# Altium PCB PWM_controller.PcbDoc
Units mm, origin at the board's own origin, x right, y up, seen from the top; angles counter-clockwise.
Board outline 60 x 55 mm, 2 copper layers (Top Layer, Bottom Layer); 77 components, 41 nets, 184 pads, 151 vias.
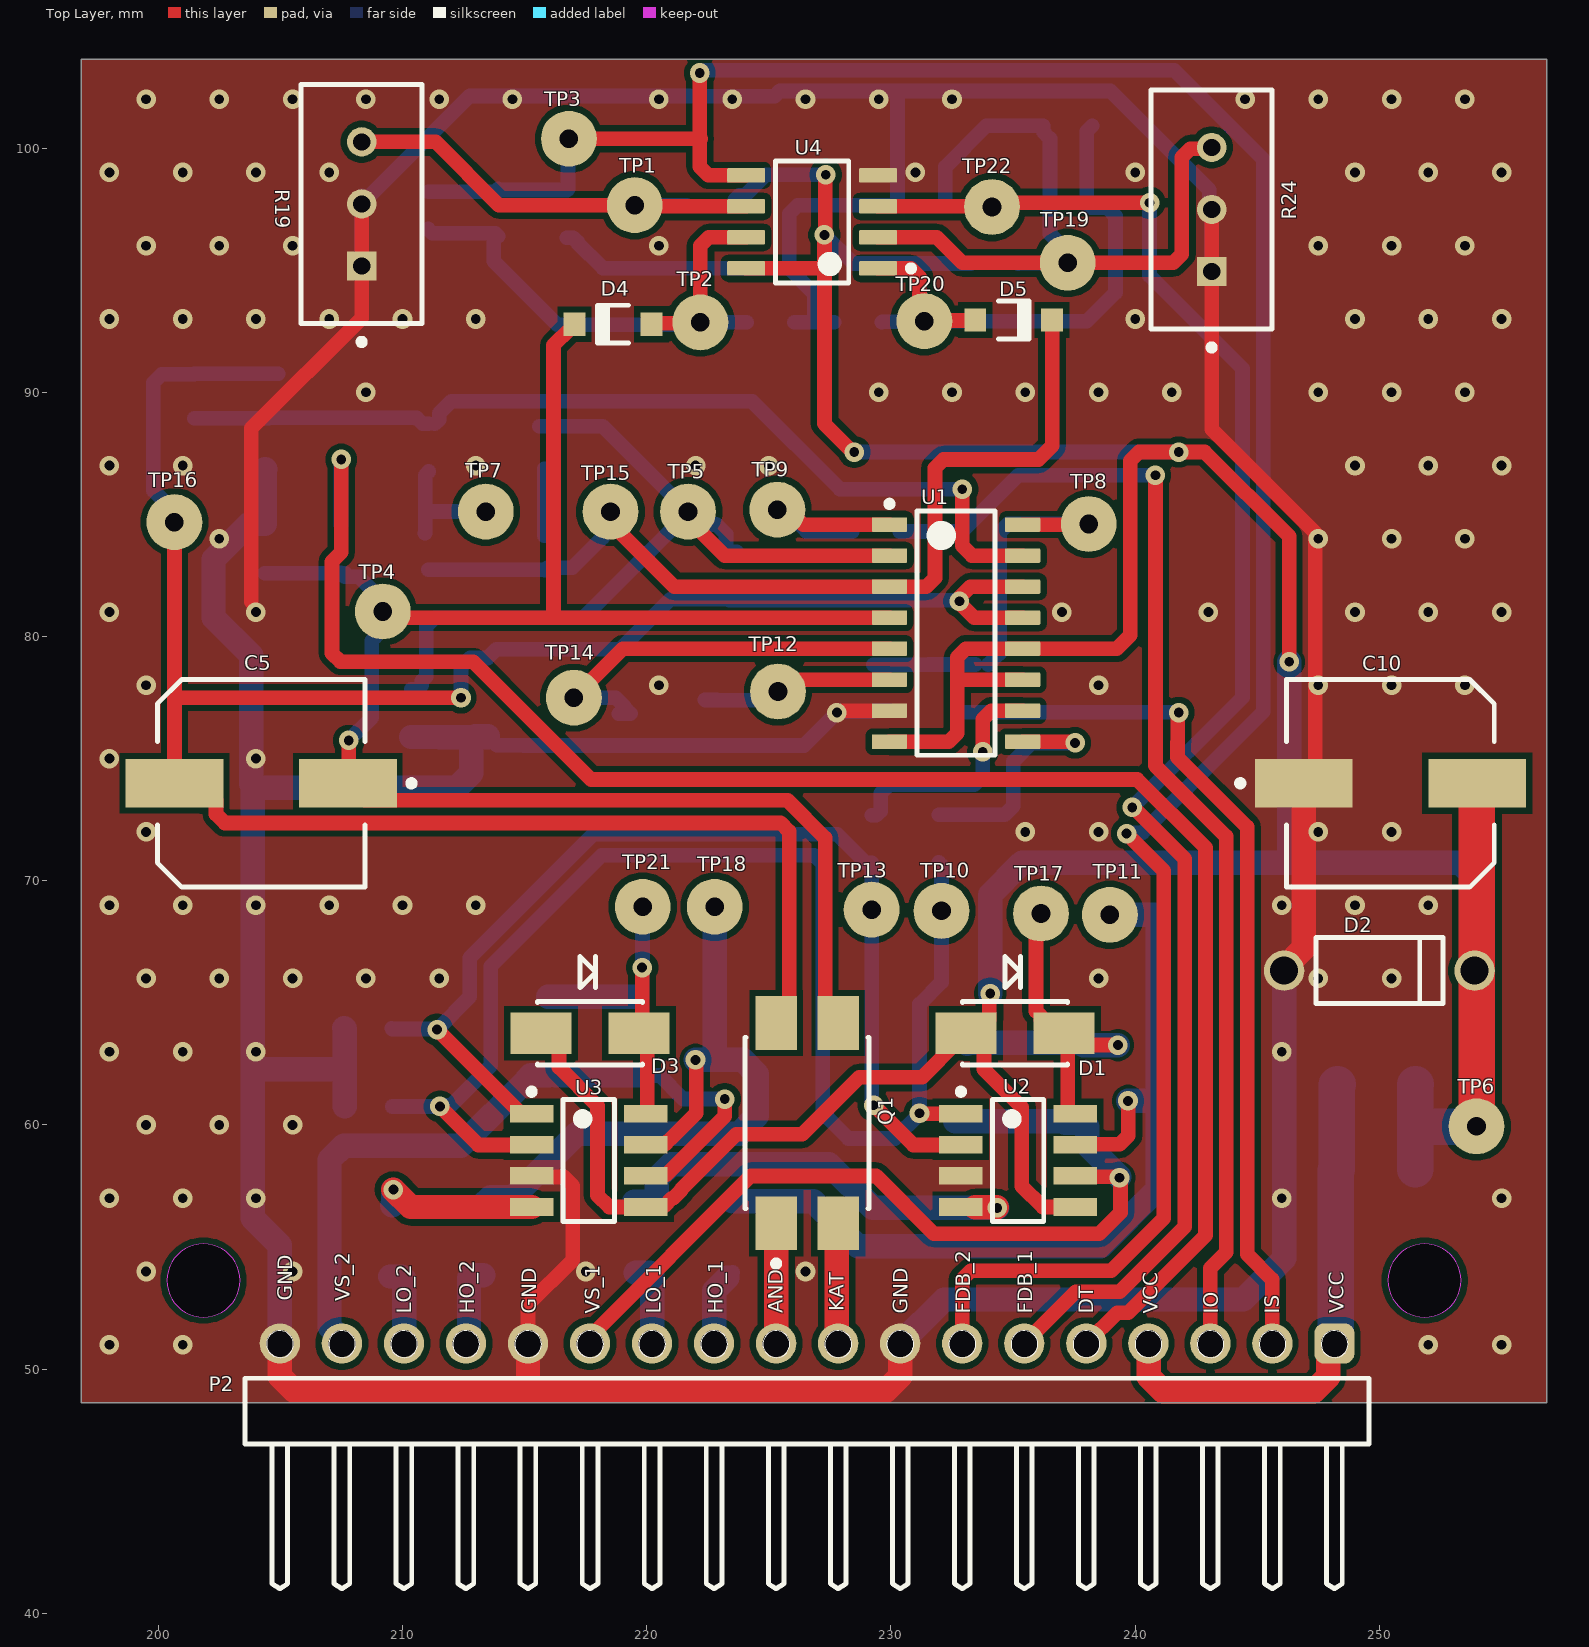
[diagram p0: Top Layer view]
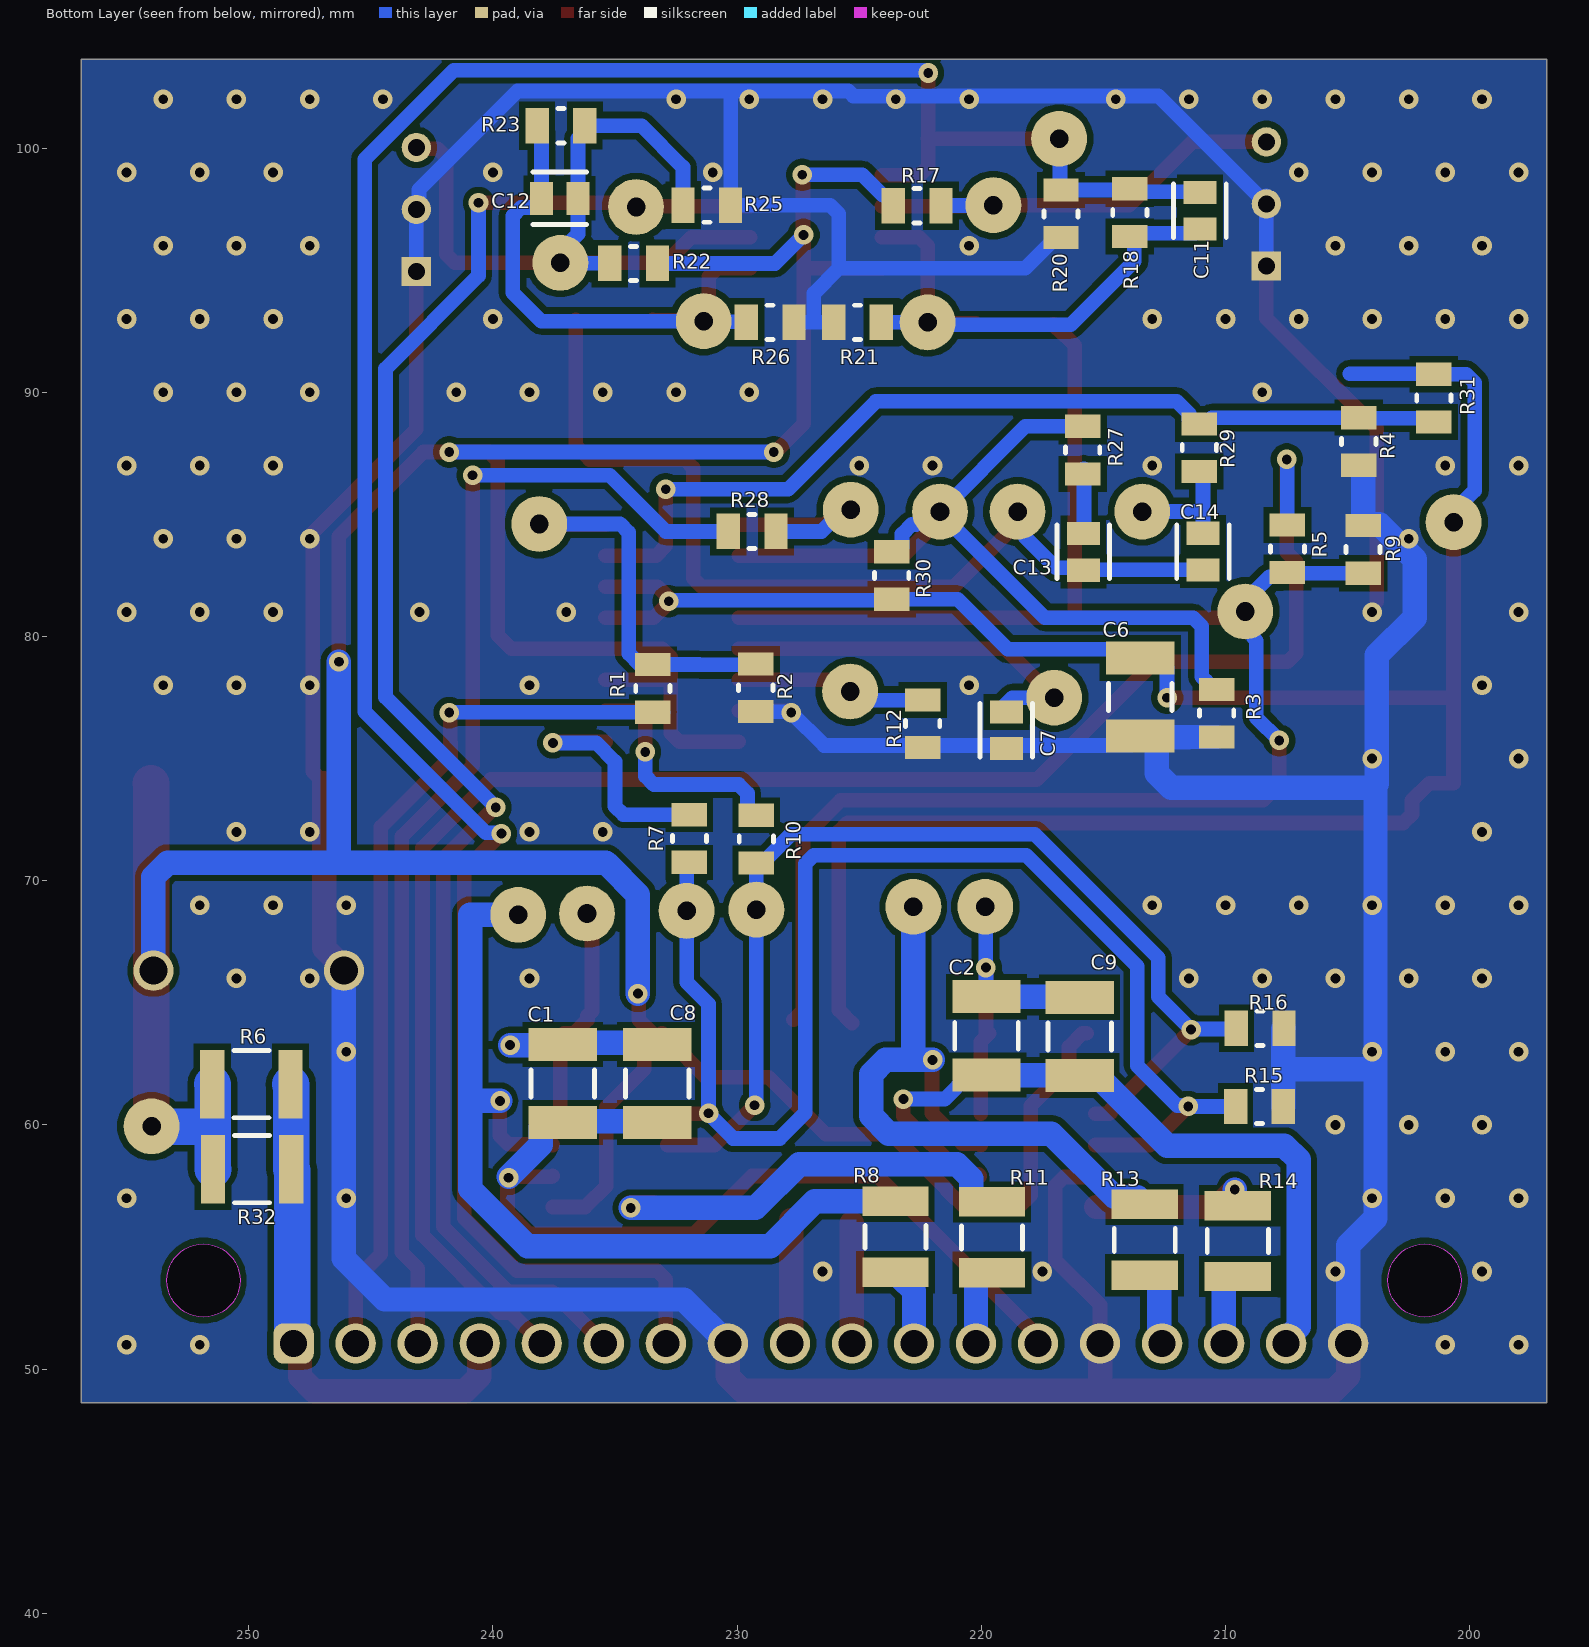
[diagram p1: Bottom Layer view, seen from below]
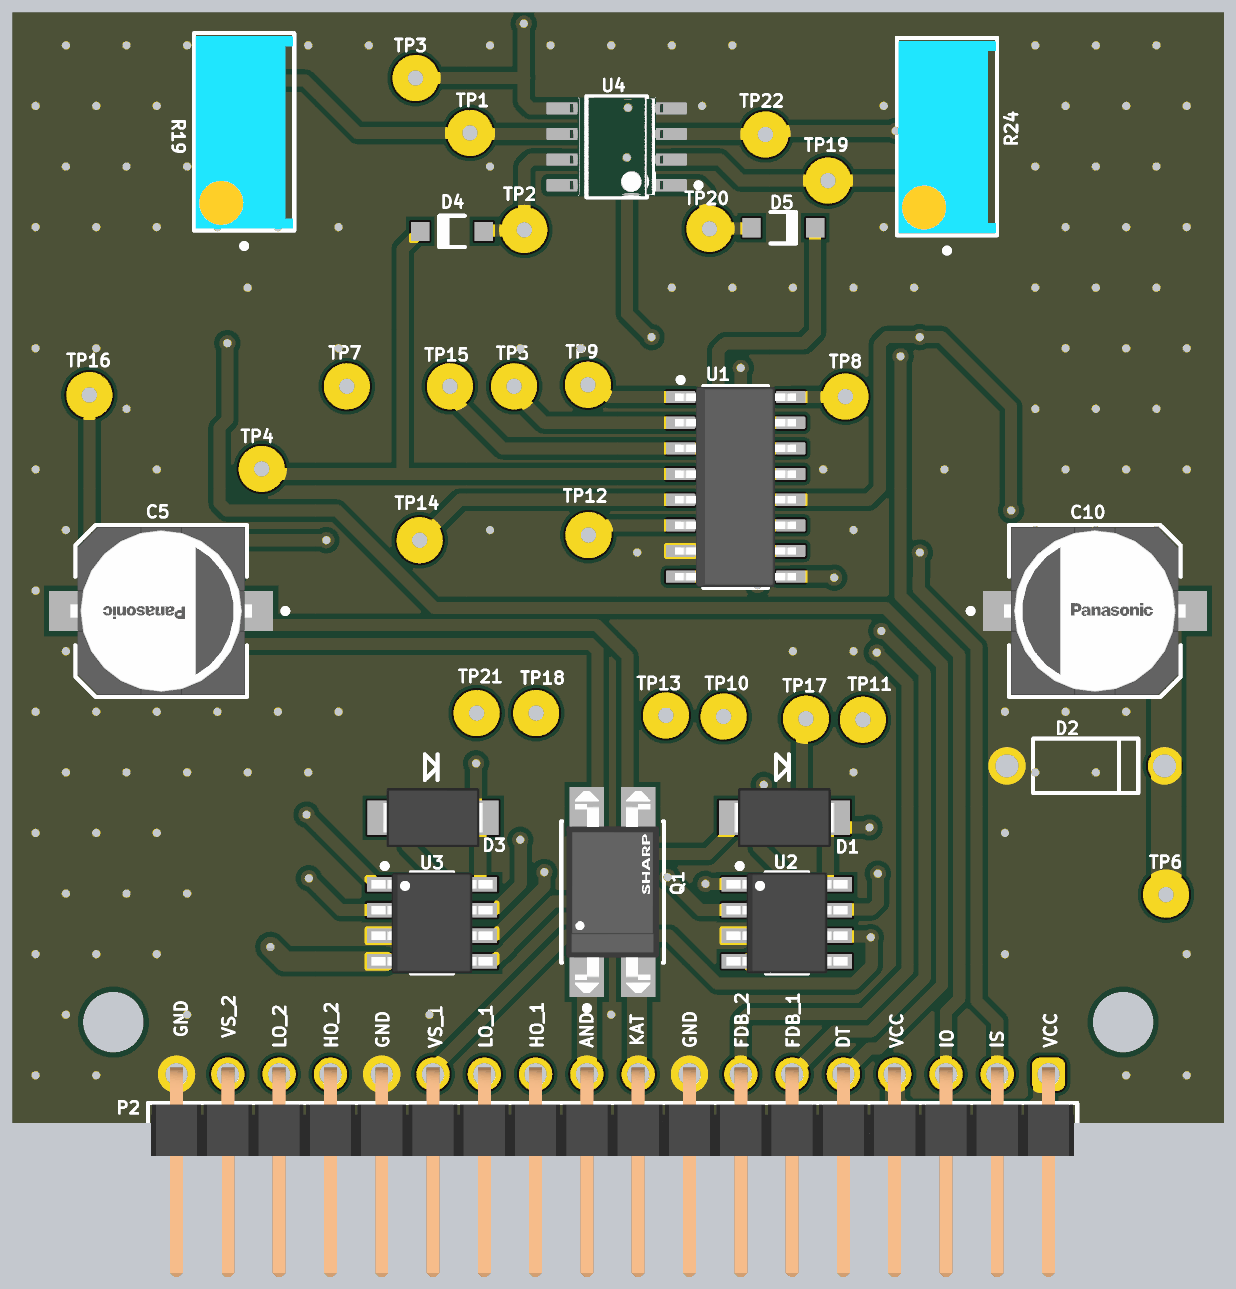
[diagram p2: 3D render of the assembled board from above, using the file's embedded part models]
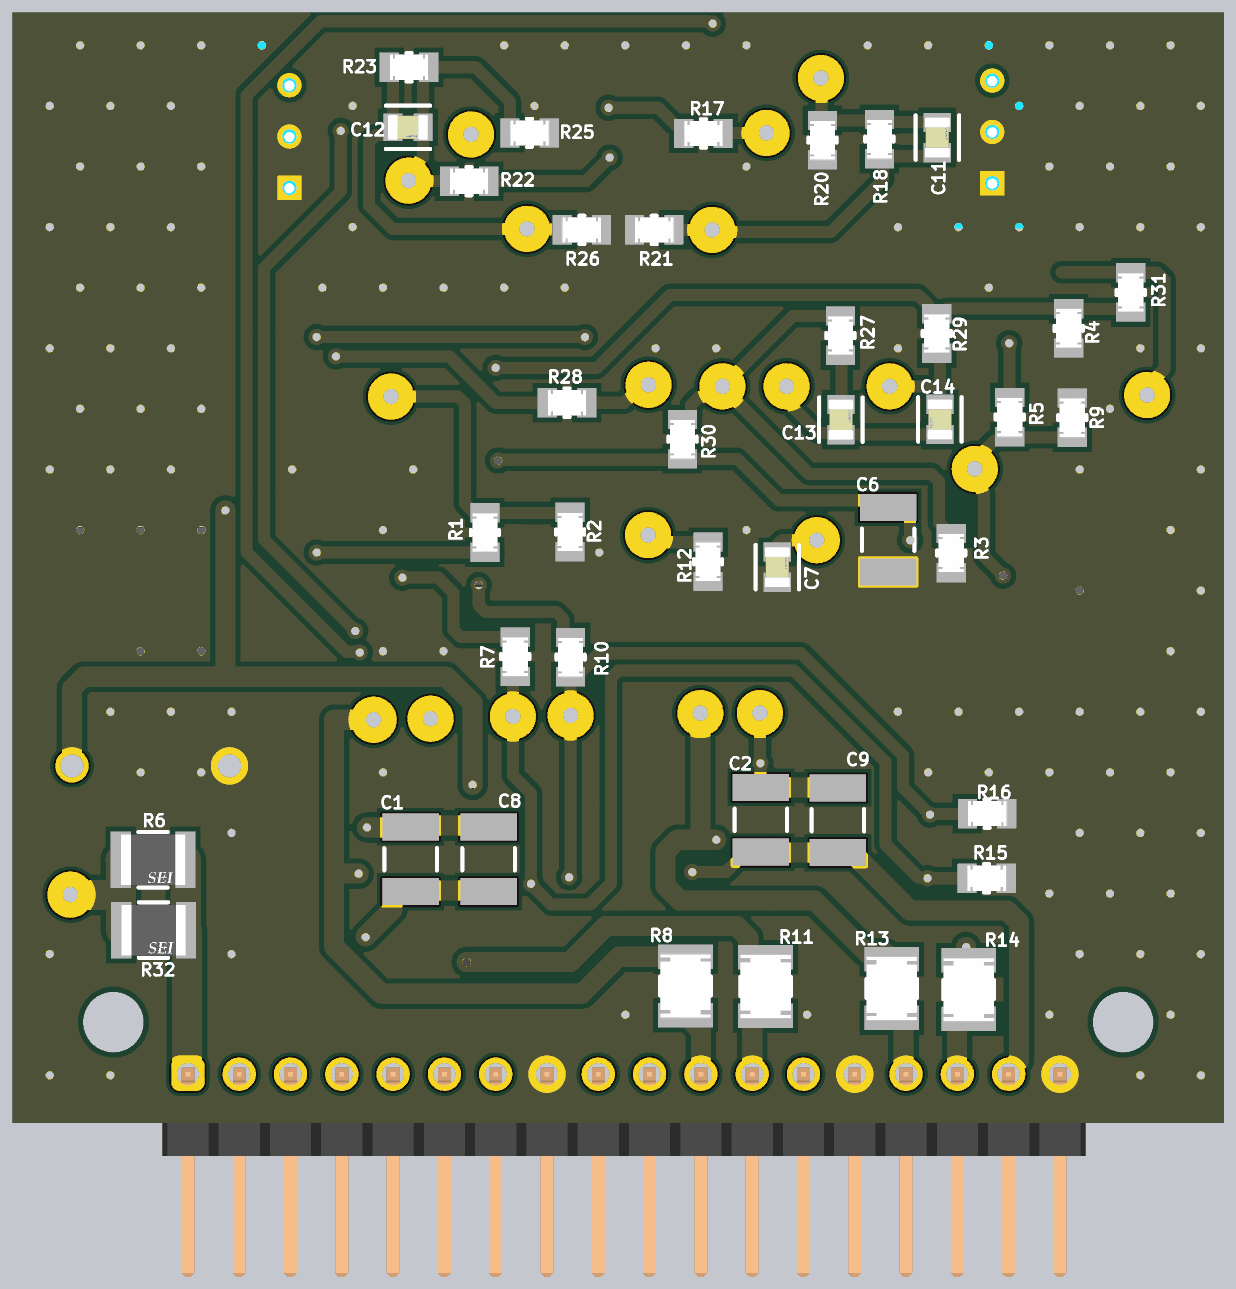
[diagram p3: 3D render of the assembled board from below, using the file's embedded part models]

## Layer stack, top to bottom
Top Solder: solder mask 0.0102, Solder Resist, Dk 3.5
Top Layer: signal copper 0.0356
Dielectric 1: dielectric 0.32, FR-4, Dk 4.8
Bottom Layer: signal copper 0.0356
Bottom Solder: solder mask 0.0102, Solder Resist, Dk 3.5

## Board outline
196.85,48.632 196.85,103.632 256.85,103.632 256.85,48.632
cut-out: 250.35,53.632 ccw(c251.85,53.632) 251.85,52.132 ccw(c251.85,53.632) 253.35,53.632 ccw(c251.85,53.632) 251.85,55.132 ccw(c251.85,53.632)
cut-out: 200.35,53.632 ccw(c201.85,53.632) 201.85,52.132 ccw(c201.85,53.632) 203.35,53.632 ccw(c201.85,53.632) 201.85,55.132 ccw(c201.85,53.632)

## Design rules (kind name [scope] priority, off if disabled: settings)
Clearance [All] p1: gap=0.254 ignorepadtopadclearanceinfootprint=FALSE except(0: Arc-Hole Track-Hole SMDPad-Hole THPad-Hole Via-Hole Fill-Hole Poly-Hole Region-Hole Text-Hole)
Height [All] p1: minheight=0 maxheight=101.6 prefheight=12.7
PlaneConnect [All] p1: planeconnectstyle=Direct reliefexpansion=0.508 reliefentries=4 reliefconductorwidth=0.254 reliefairgap=0.254
PolygonConnect [All] p1: connectstyle=Direct reliefconductorwidth=0.254 reliefentries=4 polygonreliefangle="90 Angle" airgapwidth=0.254
RoomDefinition Sheet2 [InComponentClass('Sheet2')] p1: confinementstyle=ConfineIn formatcopy=TRUE lockcomponents=FALSE outline 0,9.906 287.782,9.906 287.782,151.765 0,151.765
RoutingVias [All] p1: holewidth=0.711 width=1.27 viastyle="Through Hole" minholewidth=0.2 minwidth=0.5 maxholewidth=0.711 maxwidth=1.27
SolderMaskExpansion [All] p1: expansion=0.102 istentingtop=FALSE
Width [All] p1: maxlimit=3 minlimit=0.254 preferedwidth=1 minimp=50.000000 maximp=50.000000 favimp=50.000000
28 further rules are at their usual default settings.

## Components (designator, comment, footprint, x,y, rotation, side; value= is the part's Value field where it differs from the comment)
C1 "CAP 220nF 50V 1210(3225)" CAPC1210(3225)100_M 237.134,61.697 r270 bottom value=220nF
C2 "CAP 220nF 50V 1210(3225)" CAPC1210(3225)100_M 219.786,63.652 r270 bottom value=220nF
C5 "EEE-FK1H101GP" FP-FKF-MFG 204.216,73.99 r180 top
C6 "CAP 220nF 50V 1210(3225)" CAPC1210(3225)100_M 213.487,77.521 r90 bottom value=220nF
C7 "C0805C102K5RACTU" FP-C0805C-DN-MFG 218.973,76.163 r270 bottom value="1,000 pF"
C8 "CAP 220nF 50V 1210(3225)" CAPC1210(3225)100_M 233.274,61.697 r270 bottom value=220nF
C9 "CAP 220nF 50V 1210(3225)" CAPC1210(3225)100_M 215.976,63.627 r270 bottom value=220nF
C10 "EEE-FK1H101GP" FP-FKF-MFG 250.45,73.99 r0 top
C11 "C0805C102K5RACTU" FP-C0805C-DN-MFG 211.049,97.434 r270 bottom value="1,000 pF"
C12 "C0805C102K5RACTU" FP-C0805C-DN-MFG 237.261,97.942 r0 bottom value="1,000 pF"
C13 "0.1nF" FP-C0805C-DN-MFG 215.824,83.464 r270 bottom value="10,000 pF"
C14 "0.1nF" FP-C0805C-DN-MFG 210.922,83.478 r90 bottom value="10,000 pF"
D1 "US1M-13-F" DIOD-SMA-2_A_V 235.077,63.754 r0 top
D2 "BZX85C18" FAIR-DO-41-2 249.998,66.319 r0 top
D3 "US1M-13-F" DIOD-SMA-2_A_V 217.678,63.754 r0 top
D4 "1N4148W-7-F" DIOD-SOD123-2_V 218.618,92.786 r180 top
D5 "1N4148W-7-F" DIOD-SOD123-2_V 235.026,92.964 r0 top
P2 "61301811021" 61301811021 226.568,48.284 r0 top
Q1 "PC817XNNIP0F" FP-PC817XNNIP0F-MFG 226.568,60.074 r90 top
R1 "2K" FP-CRCW0805-e3-MFG 233.451,77.876 r90 bottom
R2 "2K" FP-CRCW0805-e3-MFG 229.235,77.902 r270 bottom
R3 "82K" FP-CRCW0805-e3-MFG 210.363,76.86 r270 bottom
R4 "2K" FP-CRCW0805-e3-MFG 204.546,87.986 r270 bottom
R5 "10K" FP-CRCW0805-e3-MFG 207.467,83.591 r270 bottom
R6 "RMCF1210JT51R0" FP-RMCF1210-MFG 249.885,61.671 r180 bottom
R7 "2K" FP-CRCW0805-e3-MFG 231.953,71.73 r90 bottom
R8 "10E" FP-CRCW1210-e3-IPC_B 223.52,55.423 r270 bottom
R9 "82K" FP-CRCW0805-e3-MFG 204.368,83.566 r90 bottom
R10 "2K" FP-CRCW0805-e3-MFG 229.21,71.706 r90 bottom
R11 "10E" FP-CRCW1210-e3-IPC_B 219.558,55.397 r270 bottom
R12 "15K" FP-CRCW0805-e3-MFG 222.402,76.429 r270 bottom
R13 "10E" FP-CRCW1210-e3-IPC_B 213.309,55.296 r270 bottom
R14 "10E" FP-CRCW1210-e3-IPC_B 209.499,55.245 r270 bottom
R15 "1K" FP-CRCW0805-e3-MFG 208.61,60.757 r180 bottom
R16 "1K" FP-CRCW0805-e3-MFG 208.585,63.957 r180 bottom
R17 "10K" FP-CRCW0805-e3-MFG 222.631,97.638 r180 bottom
R18 "1M" FP-CRCW0805-e3-MFG 213.919,97.358 r270 bottom
R19 "10K" FP-3296W-MFG 208.326,97.714 r270 top value=500kΩ
R20 "100K" FP-CRCW0805-e3-MFG 216.738,97.307 r270 bottom
R21 "100K" FP-CRCW0805-e3-MFG 225.069,92.862 r0 bottom
R22 "10K" FP-CRCW0805-e3-MFG 234.239,95.275 r0 bottom
R23 "1M" FP-CRCW0805-e3-MFG 237.211,100.914 r0 bottom
R24 "10K" FP-3296W-MFG 243.129,97.485 r270 top value=500kΩ
R25 "100K" FP-CRCW0805-e3-MFG 231.242,97.663 r180 bottom
R26 "100K" FP-CRCW0805-e3-MFG 228.651,92.862 r180 bottom
R27 "2K" FP-CRCW0805-e3-MFG 215.849,87.63 r270 bottom
R28 "2K" FP-CRCW0805-e3-MFG 229.387,84.303 r180 bottom
R29 "2K" FP-CRCW0805-e3-MFG 211.074,87.732 r270 bottom
R30 "2K" FP-CRCW0805-e3-MFG 223.672,82.499 r270 bottom
R31 "2K" FP-CRCW0805-e3-MFG 201.473,89.764 r90 bottom
R32 "RMCF1210JT51R0" FP-RMCF1210-MFG 249.86,58.191 r180 bottom
TP1 "Test_Point_PCB" Test_Point 219.507,97.663 r0 top
TP2 "Test_Point_PCB" Test_Point 222.198,92.862 r0 top
TP3 "Test_Point_PCB" Test_Point 216.814,100.381 r0 top
TP4 "Test_Point_PCB" Test_Point 209.194,81.026 r0 top
TP5 "Test_Point_PCB" Test_Point 221.691,85.115 r0 top
TP6 "Test_Point_PCB" Test_Point 253.975,59.944 r0 top
TP7 "Test_Point_PCB" Test_Point 213.411,85.115 r0 top
TP8 "Test_Point_PCB" Test_Point 238.1,84.607 r0 top
TP9 "Test_Point_PCB" Test_Point 225.349,85.192 r0 top
TP10 "Test_Point_PCB" Test_Point 232.067,68.766 r90 top
TP11 "Test_Point_PCB" Test_Point 238.963,68.605 r90 top
TP12 "Test_Point_PCB" Test_Point 225.374,77.749 r90 top
TP13 "Test_Point_PCB" Test_Point 229.21,68.817 r90 top
TP14 "Test_Point_PCB" Test_Point 217.018,77.495 r90 top
TP15 "Test_Point_PCB" Test_Point 218.516,85.115 r90 top
TP16 "Test_Point_PCB" Test_Point 200.66,84.684 r90 top
TP17 "Test_Point_PCB" Test_Point 236.144,68.656 r90 top
TP18 "Test_Point_PCB" Test_Point 222.783,68.936 r90 top
TP19 "Test_Point_PCB" Test_Point 237.236,95.301 r90 top
TP20 "Test_Point_PCB" Test_Point 231.369,92.913 r90 top
TP21 "Test_Point_PCB" Test_Point 219.837,68.936 r90 top
TP22 "Test_Point_PCB" Test_Point 234.137,97.587 r90 top
U1 "TL494CDR" D0016A_N 232.664,80.137 r0 top
U2 "IR2181STRPBF" INTR-SOIC-8_V 235.204,58.547 r0 top
U3 "IR2181STRPBF" INTR-SOIC-8_V 217.627,58.547 r0 top
U4 "LM358DR" FP-D0008A-MFG 226.771,96.977 r180 top

## Footprints (in the part's own frame and the unit in brackets; to place one, negate y for a bottom-side part, rotate by r counter-clockwise, add the part's x,y. Pads: shape width x height; smd on the part's side, far side on the other; paste and mask are expansions set on the pad)
61301811021 [mm] "Pin Header, pitch 2.54 mm, THT, Angled, single row, 18p"
  rrect50% 1.65x1.65 hole 1.1: 1(21.59,2.77)
  round 1.65 hole 1.1: 2(19.05,2.77) 3(16.51,2.77) 4(13.97,2.77) 5(11.43,2.77) 6(8.89,2.77) 7(6.35,2.77) 8(3.81,2.77) 9(1.27,2.77) 10(-1.27,2.77) 11(-3.81,2.77) 12(-6.35,2.77) 13(-8.89,2.77) 14(-11.43,2.77) 15(-13.97,2.77) 16(-16.51,2.77) 17(-19.05,2.77) 18(-21.59,2.77)
  silkscreen extent -23.01,-7.27 23.01,1.35, body extent -22.86,-7.27 22.86,3.09, height 2.58
CAPC1210(3225)100_M [mm] "Chip Capacitor, Body 3.2x2.5mm, Height 1mm, IPC Low Density"
  rect 1.35x2.8 smd: 1(-1.6,0) 2(1.6,0)
  silkscreen extent -0.55,-1.3 0.55,1.3, body extent -1.7,-1.35 1.7,1.35, height 1
D0016A_N [mm] "SOIC, 16-Leads, Body 10x4mm, Pitch 1.27mm, IPC Medium Density"
  rrect17% 1.45x0.6 smd: 1(-2.725,4.445) 2(-2.725,3.175) 3(-2.725,1.905) 4(-2.725,0.635) 5(-2.725,-0.635) 6(-2.725,-1.905) 7(-2.725,-3.175) 8(-2.725,-4.445) 9(2.725,-4.445) 10(2.725,-3.175) 11(2.725,-1.905) 12(2.725,-0.635) 13(2.725,0.635) 14(2.725,1.905) 15(2.725,3.175) 16(2.725,4.445)
  silkscreen extent -2.85,-5 1.6,5.42, body extent -3,-4.95 3,4.95, height 1.59
DIOD-SMA-2_A_V [mm] "SMA, 2-Leads, Body 4.3x2.605mm"
  rect 2.5x1.7 smd: 1(-2,0) 2(2,0)
  silkscreen extent -2.15,-1.3 2.15,3.14, body extent -2.52,-1.46 2.52,1.46, height 2.4
DIOD-SOD123-2_V [mm] "SOD123, 2-Leads, Body 2.7x1.55mm, Height 1.45mm"
  rect 0.9x0.95 smd: 1(-1.575,0) 2(1.575,0)
  silkscreen extent -0.64,-0.83 0.64,0.77, body extent -1.35,-0.77 1.35,0.77, height 1.45
FAIR-DO-41-2 [mm] "THD, 2-Leads, Body 5.2x2.72mm, Pin Spacing 7.8mm"
  round 1.65 hole 1.15: 1(-3.9,0) 2(3.9,0)
  silkscreen extent -2.6,-1.35 2.6,1.35, body extent -4.29,-1.17 4.29,1.17, height 2.35
FP-3296W-MFG [mm]
  rect 1.2x1.2 hole 0.7 paste-1000 mask+0: 1(2.54,0.005)
  round 1.2 hole 0.7 paste-1000 mask+0: 2(0,0.005) 3(-2.54,0.005)
  silkscreen extent -4.89,-2.48 5.77,2.48, body extent -4.99,-2.58 4.99,2.58, height 0.25
FP-C0805C-DN-MFG [mm]
  rect 0.95x1.35 smd paste+0 mask+0: 1(-0.75,0) 2(0.75,0)
  silkscreen extent -1.1,-1.07 1.1,1.07, body extent -1,-0.63 1,0.63, height 0.88
FP-CRCW0805-e3-MFG [mm]
  rect 0.95x1.45 smd paste+0 mask+0: 1(-0.975,0) 2(0.975,0)
  silkscreen extent -0.13,-0.7 0.13,0.7, body extent -1,-0.63 1,0.63, height 0.5
FP-CRCW1210-e3-IPC_B [mm]
  rect 1.205x2.706 smd paste+0 mask+0: 1(-1.451,0) 2(1.451,0)
  silkscreen extent -0.47,-1.25 0.47,1.25, body extent -1.6,-1.25 1.6,1.25, height 0.6
FP-D0008A-MFG [mm]
  rrect17% 1.55x0.6 smd paste+0 mask+0: 1(-2.7,1.905) 2(-2.7,0.635) 3(-2.7,-0.635) 4(-2.7,-1.905) 5(2.7,-1.905) 6(2.7,-0.635) 7(2.7,0.635) 8(2.7,1.905)
  silkscreen extent -4.18,-2.5 1.5,2.5, body extent -3.57,-2.75 3.57,2.75, height 0.25
FP-FKF-MFG [mm]
  rect 4x2 smd paste+0 mask+0: 1(-3.55,0) 2(3.55,0)
  silkscreen extent -6.28,-4.25 4.25,4.25, body extent -5.8,-4.5 5.8,4.5, height 0.25
FP-PC817XNNIP0F-MFG [mm]
  rect 2.2x1.7 smd paste+0 mask+0: 1(-4.1,1.27) 2(-4.1,-1.27) 3(4.1,-1.27) 4(4.1,1.27)
  silkscreen extent -5.87,-2.54 3.5,2.54, body extent -5.3,-2.64 5.3,2.64, height 0.25
FP-RMCF1210-MFG [mm]
  rect 1x2.8 smd paste+0 mask+0: 1(-1.6,0) 2(1.6,0)
  silkscreen extent -0.72,-1.38 0.72,1.38, body extent -1.6,-1.25 1.6,1.25, height 0.7
INTR-SOIC-8_V [mm]
  rect 1.78x0.72 smd: 1(-2.34,1.905) 2(-2.34,0.635) 3(-2.34,-0.635) 4(-2.34,-1.905) 5(2.34,-1.905) 6(2.34,-0.635) 7(2.34,0.635) 8(2.34,1.905)
  silkscreen extent -2.46,-2.5 1.05,2.94, body extent -3,-2.5 3,2.5, height 1.75
Test_Point [mil]
  round 90 hole 30 unplated paste+4 mask+4: 1(0,0)

## Part data
C1 C2 C6 C8 C9: library part CMP-1038-01811-1, "CAP 220nF 50V ±10% 1210 (3225 Metric) Thickness 1mm SMD", Case-EIA=1210, Case-Metric=3225, Rated Voltage="50 V", Tolerance=Â±10%, Max Thickness="1 mm", Technology=SMT
C5 C10: library part CMP-05427-000032-1, "CAP ALUM 100UF 20% 50V SMD", Capacitance=100uF, Case/Package=SMD/SMT, ESR (Equivalent Series Resistance)=340mR, Leakage Current=10mA, Max Operating Temperature=105°C, Min Operating Temperature=-55°C, Package Quantity=1, Ripple Current=350mA, Tolerance=20%, Voltage=50V, Construction=Cylindrical, Contact Plating=Tin, Diameter=8mm, Height=10.2mm, Height - Seated (Max)=0.402inch, Impedance=340mR, Lead Free="Lead Free", Length=10.2mm, Life (Hours)=5000Hour, Mount="Surface Mount", Number of Pins=2, Packaging="Tape and Reel", Radiation Hardening=No, REACH SVHC="No SVHC", Ripple Current (AC)=350mA, RoHS Compliant=Yes, Series=FK, Termination=SMD/SMT, Voltage Rating=50V, Voltage Rating (DC)=50V, Width=10mm
C7 C11 C12: library part CMP-2007-01097-2, "CAP CER 1000PF 50V X7R 0805", Capacitance="1,000 pF", Manufacturer=KEMET, Package=C0805C-DN, Temperature="-55°C to +125°C", Temperature Characteristic=X7R, Temperature Coefficient=30ppm/°C, Temperature Range High=+125°C, Temperature Range Low=-55°C, Tolerance=0.1, Voltage Rating="50 V", Automotive=No, Category=Cap, ComponentLink2Description=Datasheet, ComponentLink2URL=https://content.kemet.com/datasheets/KEM_C1003_C0G_SMD.pdf, Device Class L1="Passive Components", Device Class L2=Capacitors, Device Class L3="Ceramic Capacitors", Digikey Description="CAP CER 1000PF 50V X7R 0805", Height=0.88mm, Ipc Land Pattern Name=CAPC200125X78, Lead Free=Yes, Manufacturer Part Number=C0805C102K5RACTU, Material=Ceramic, Mouser Description="Cap Ceramic 0.001uF 50V X7R 10% SMD 0805 125C Plastic T/R", Octopart=https://octopart.com/c0805c102k5ractu-kemet-93010, RoHS=TRUE
C13 C14: library part CMP-2007-00254-2, "CAP CER 10000PF 50V X7R 0805", Capacitance="10,000 pF", Manufacturer=KEMET, Manufacturer Part Number=C0805C103J5RACTU, Package=C0805C-DN, Temperature="-55°C to +125°C", Temperature Characteristic=X7R, Temperature Coefficient=30ppm/°C, Temperature Range High=+125°C, Temperature Range Low=-55°C, Tolerance=0.05, Voltage Rating="50 V", Automotive=No, Category=Cap, ComponentLink2Description=Datasheet, ComponentLink2URL=https://content.kemet.com/datasheets/KEM_C1003_C0G_SMD.pdf, Device Class L1="Passive Components", Device Class L2=Capacitors, Device Class L3="Ceramic Capacitors", Digikey Description="CAP CER 10000PF 50V X7R 0805", Height=0.88mm, Ipc Land Pattern Name=CAPC200125X78, Lead Free=Yes, Material=Ceramic, Mouser Description="Capacitor; Ceramic; Cap 0.01uF; Tol 5%; Vol-Rtg 50 V; SMT; Case 0805; X7R; TR", Octopart=https://octopart.com/c0805c103j5ractu-kemet-133473, RoHS=TRUE
D1 D3: library part CMP-2000-07364-1, "Ultra-Fast Rectifier, 1 A, 1.7 V, -65 to 150 degC, 2-Pin SMA, RoHS, Tape and Reel", Average Rectified Current-Max=1A, Forward Voltage=1.7V, Manufacturer="Diodes Inc", Package Description="2-Pin Surface Mount Device, Body 4.3 x 2.605 mm", Package Reference=SMA-2, Reverse Current-Max=5µA, Reverse Voltage-Max [Vrrm]=1000V, Datasheet URL=http://www.diodes.com/_files/datasheets/ds16008.pdf, Datasheet Version="Rev. 11-2, 12/2014", Manufacturer URL=http://www.diodes.com/, Mounting Technology=SurfaceMount, Reverse Recovery Time-Max=75ns
D2: library part CMP-2000-05984-1, "Zener Diode, 18 V, +/- 5%, -60 to 200 degC, 2-Pin DO-204AL (DO-41), RoHS, Bulk", Manufacturer=FairchildSemiconductor, Maximum Power Dissipation=1000mW, Maximum Reverse Leakage Current=0.5uA, Nominal Zener Voltage=17.95V, Operating Temperature=-65to200°C, Package=2DO-41, Package Description="2-Pin Axial Lead, Dia 2.375 mm, Body Length 4.63 mm", Package Reference=DO-41-2, Package Version="Rev. 2, 09/2008", Zener Voltage Tolerance=5%, Category=Zener, Configuration=Single, Datasheet URL=https://www.fairchildsemi.com/datasheets/BZ/BZX85C10.pdf, Datasheet Version="Rev. 1.1.0, 09/2013", Manufacturer URL=https://www.fairchildsemi.com/, Mounting=ThroughHole, Mounting Technology=ThroughHole, Package URL=http://www.fairchildsemi.com/dwg/DO/DO41A.pdf, Packaging=Bulk, Rad Hard=No
D4 D5: library part CMP-2000-04932-2, "Fast Switching Diode, 100 V, 0.15 A, -65 to 150 degC, 2-Pin?SOD123, RoHS, Tape and Reel", If - Forward Current=0.15A, Ir - Reverse Current=1uA, Manufacturer=DiodesIncorporated, Max Surge Current=2A, Maximum Operating Temperature=+150C, Minimum Operating Temperature=-65C, Operating Temperature Range=-65Cto+150C, Package / Case=SOD-123, Package Reference=SOD123-2, Peak Reverse Voltage=100V, Vf - Forward Voltage=1.25V, Brand=DiodesIncorporated, Configuration=Single, Datasheet URL=http://www.farnell.com/datasheets/1915529.pdf, Datasheet Version="Rev. 24-2, 10/2013", Factory Pack Quantity=3000, Height=1.25mm, Length=2.85mm, Manufacturer URL=http://www.diodes.com/, Mounting Style=SMD/SMT, Package URL=http://www.diodes.com/datasheets/ds18004.pdf, Packaging=Reel, Product=SwitchingDiodes, Product Category=Diodes-GeneralPurpose,Power,Switching, Recovery Time=4ns, RoHS=True, Series=1N4148, Type=SwitchingDiode, Unit Weight=0.000353oz, Width=1.7mm
P2: "WR-PHD Pin Header, THT, Angled, pitch 2.54mm, 1 Row, 18P", Contact Resistance=20mΩ, Manufacturer="Wurth Elektronik", Operating Temperature Max=105°C, Operating Temperature Min=-40°C, Rated Current=3A, Withstanding Voltage=500V, Working Voltage=250V, Category="Board-to-Board Connectors", ComponentLink1Description="Website Link", ComponentLink1URL=https://www.we-online.com/redexpert/article/61301811021?ad, ComponentLink2Description="Datasheet Link", ComponentLink2URL=https://www.we-online.com/redexpert/spec/61301811021?ad, Gender="Pin Header", Manufacturer Part Number=61301811021, Match Code=WR-PHD, Mount="Through Hole", Number of Pins=18, Number of Rows=1, Orientation=Angled, Packaging=Bag, Pitch=2.54mm
Q1: library part CMP-65434-000005-1, "OPTOISOLATOR 5KV TRANS 4SMD", Case/Package=SMD/SMT, Collector Emitter Saturation Voltage=200mV, Collector Emitter Voltage (VCEO)=80V, Forward Current=50mA, Forward Voltage=1.4V, Isolation Voltage=5kV, Max Operating Temperature=100°C, Max Power Dissipation=200mW, Min Operating Temperature=-30°C, Output Current per Channel=30mA, Package Quantity=2000, Reverse Breakdown Voltage=6V, Collector-emitter Voltage-Max=200mV, Contact Plating=Copper, Fall Time=18000ns, Input Current=50mA, Input Type=DC, Isolation Voltage-Max=5kV, Lead Free="Lead Free", Max Collector Current=50mA, Max Input Current=50mA, Max Output Voltage=80V, Mount="Surface Mount", Number of Channels=1, Number of Elements=1, Number of Pins=4, Output Voltage=80V, Packaging="Tape and Reel", Power Dissipation=200mW, Radiation Hardening=No, Rise Time=18000ns, RoHS Compliant=Yes
R1 R2 R4 R7 R10 R15 R16 R27 R28 R29 R30 R31: library part CMP-2001-04908-2, "RES Thick Film, 2kΩ, 1%, 0.125W, 100ppm/°C, 0805", Case Code (Imperial)=0805, Case Code (Metric)=2012, Max Operating Temperature=155°C, Min Operating Temperature=-55°C, Package Quantity=5000, Power Rating=125mW, Resistance=10kR, Temperature Coefficient=100ppm/°C, Tolerance=1%, Voltage Rating=150V, Case/Package=0805, Composition="Thick Film", Contact Plating=Tin, Depth=1.25mm, Height=0.45mm, Lead Free="Lead Free", Length=2mm, Military Standard=Not, Packaging="Tape and Reel", Radiation Hardening=No, Termination=SMD/SMT, Voltage Rating (DC)=150V, Weight=0.000194oz, Width=1.25mm
R3 R9: library part CMP-2001-04908-2, "RES Thick Film, 82kΩ, 1%, 0.125W, 100ppm/°C, 0805", Case Code (Imperial)=0805, Case Code (Metric)=2012, Max Operating Temperature=155°C, Min Operating Temperature=-55°C, Package Quantity=5000, Power Rating=125mW, Resistance=10kR, Temperature Coefficient=100ppm/°C, Tolerance=1%, Voltage Rating=150V, Case/Package=0805, Composition="Thick Film", Contact Plating=Tin, Depth=1.25mm, Height=0.45mm, Lead Free="Lead Free", Length=2mm, Military Standard=Not, Packaging="Tape and Reel", Radiation Hardening=No, Termination=SMD/SMT, Voltage Rating (DC)=150V, Weight=0.000194oz, Width=1.25mm
R5 R17 R22: library part CMP-2001-04908-2, "RES Thick Film, 10kΩ, 1%, 0.125W, 100ppm/°C, 0805", Case Code (Imperial)=0805, Case Code (Metric)=2012, Max Operating Temperature=155°C, Min Operating Temperature=-55°C, Package Quantity=5000, Power Rating=125mW, Resistance=10kR, Temperature Coefficient=100ppm/°C, Tolerance=1%, Voltage Rating=150V, Case/Package=0805, Composition="Thick Film", Contact Plating=Tin, Depth=1.25mm, Height=0.45mm, Lead Free="Lead Free", Length=2mm, Military Standard=Not, Packaging="Tape and Reel", Radiation Hardening=No, Termination=SMD/SMT, Voltage Rating (DC)=150V, Weight=0.000194oz, Width=1.25mm
R6 R32: library part CMP-26527-006785-1, "51Ω ±5% 0.5W 1210 Thick Film Chip Resistor AEC-Q200 compliant", Case Code (Imperial)=1210, Case Code (Metric)=3225, Max Operating Temperature=155°C, Max Power Dissipation=500mW, Min Operating Temperature=-55°C, Resistance=51R, Resistor Type="Thick Film", Temperature Coefficient=200ppm/°C, Tolerance=5%, Case/Package=1210, Contact Plating=Tin, Features="Automotive AEC-Q200", Height=0.028inch, Lead Free="Lead Free", Length=0.126inch, Mount="Surface Mount", Number of Terminations=2, Packaging="Tape and Reel", Radiation Hardening=No, RoHS Compliant=Yes, Series=RMCF, Width=0.098inch
R8 R11 R13 R14: library part CMP-2005-01987-2, "RES SMD 10 OHM 1% 1/2W 1992", Case Code (Imperial)=1210, Case Code (Metric)=3225, Max Operating Temperature=155°C, Max Power Dissipation=500mW, Min Operating Temperature=-55°C, Package Quantity=1, Resistance=0mR, Temperature Coefficient=0ppm/°C, Voltage Rating=200V, Case/Package=1210, Composition="Thick Film", Contact Plating=Tin, Depth=2.5mm, Features="Automotive AEC-Q200", Height=0.55mm, Length=3.2mm, Military Standard=Not, Mount="Surface Mount", Number of Terminations=2, Packaging="Tape and Reel", Power Rating=500mW, Radiation Hardening=No, REACH SVHC="No SVHC", Termination=SMD/SMT, Weight=0.000564oz, Width=0.098inch
R12: library part CMP-2001-04908-2, "RES Thick Film, 15kΩ, 1%, 0.125W, 100ppm/°C, 0805", Case Code (Imperial)=0805, Case Code (Metric)=2012, Max Operating Temperature=155°C, Min Operating Temperature=-55°C, Package Quantity=5000, Power Rating=125mW, Resistance=10kR, Temperature Coefficient=100ppm/°C, Tolerance=1%, Voltage Rating=150V, Case/Package=0805, Composition="Thick Film", Contact Plating=Tin, Depth=1.25mm, Height=0.45mm, Lead Free="Lead Free", Length=2mm, Military Standard=Not, Packaging="Tape and Reel", Radiation Hardening=No, Termination=SMD/SMT, Voltage Rating (DC)=150V, Weight=0.000194oz, Width=1.25mm
R18 R23: library part CMP-2001-04908-2, "RES Thick Film, 1MΩ, 1%, 0.125W, 100ppm/°C, 0805", Case Code (Imperial)=0805, Case Code (Metric)=2012, Max Operating Temperature=155°C, Min Operating Temperature=-55°C, Package Quantity=5000, Power Rating=125mW, Resistance=10kR, Temperature Coefficient=100ppm/°C, Tolerance=1%, Voltage Rating=150V, Case/Package=0805, Composition="Thick Film", Contact Plating=Tin, Depth=1.25mm, Height=0.45mm, Lead Free="Lead Free", Length=2mm, Military Standard=Not, Packaging="Tape and Reel", Radiation Hardening=No, Termination=SMD/SMT, Voltage Rating (DC)=150V, Weight=0.000194oz, Width=1.25mm
R19 R24: library part CMP-2000-05583-2, "TRIMMER 10K OHM 0.5W PC PIN TOP", Manufacturer=Bourns, Manufacturer Part Number=3296W-1-504LF, Package=3296W, Power Rating=0.5W, Resistance=500kΩ, Temperature="-55°C to +125°C", Temperature Coefficient=100ppm/°C, Temperature Range High=+125°C, Temperature Range Low=-55°C, Tolerance=10%, Voltage Rating=300V, Automotive=No, Category=Res, ComponentLink2Description=Datasheet, ComponentLink2URL=https://www.bourns.com/docs/Product-Datasheets/3296.pdf, Device Class L1="Passive Components", Device Class L2=Resistors, Device Class L3="Variable Resistors and Potentiometers", Digikey Description="TRIMMER 500K OHM 0.5W PC PIN TOP", Height=12.05mm, Lead Free=Yes, Mouser Description="Trimmer; Cermet; Rest 500 Kilohms; PCB; 25 Turns; Pwr-Rtg 0.5W", Octopart=https://octopart.com/3296w-1-504lf-bourns-143884, RoHS=TRUE, Series="Trimpot 3296-Sealed", Standoff Height=0.38mm
R20 R21 R25 R26: library part CMP-2001-04908-2, "RES Thick Film, 100kΩ, 1%, 0.125W, 100ppm/°C, 0805", Case Code (Imperial)=0805, Case Code (Metric)=2012, Max Operating Temperature=155°C, Min Operating Temperature=-55°C, Package Quantity=5000, Power Rating=125mW, Resistance=10kR, Temperature Coefficient=100ppm/°C, Tolerance=1%, Voltage Rating=150V, Case/Package=0805, Composition="Thick Film", Contact Plating=Tin, Depth=1.25mm, Height=0.45mm, Lead Free="Lead Free", Length=2mm, Military Standard=Not, Packaging="Tape and Reel", Radiation Hardening=No, Termination=SMD/SMT, Voltage Rating (DC)=150V, Weight=0.000194oz, Width=1.25mm
TP1 TP2 TP3 TP4 TP5 TP6 TP7 TP8 TP9 TP10 TP11 TP12 TP13 TP14 TP15 TP16 TP17 TP18 TP19 TP20 TP21 TP22: library part TP_PCB?, "Test_Point"
U1: library part CMP-0319-00950-2, "Pulse-Width-Modulation Control Circuit with Voltage Control, 45 % Duty Cycle, 0 to +70 degC, 16-pin SOIC (D), Green (RoHS & no Sb/Br)", Frequency(Max)(kHz)=300, Manufacturer="Texas Instruments", Rating=Military, Code_JEDEC=MS-012AC, ComponentLink1Description=Datasheet, ComponentLink1URL=http://www.ti.com/general/docs/lit/getliterature.tsp?genericPartNumber=TL494&fileType=pdf, Control Method=Voltage, DatasheetVersion=SLVS074E, Duty Cycle(Max)(%)=45, Eco-Plan="Green (RoHS & no Sb/Br)", Mounting Technology="Surface Mount", PackageDescription="16-Pin Plastic Small Outline Integrated Circuit, 9.9 x 3.9 mm, Pitch 1.27 mm Pitch", PackageReference=D0016A, PackageVersion="revM, Jun-2011", PartNumber=TL494CDR, Regulated Outputs(#)=2, SubFamily="PWM Controller", Topology="Boost, Buck, Flyback, Forward, Full-Bridge, Half-Bridge, Push-Pull"
U2 U3: library part CMP-1671-00001-2, "IC DRIVER HIGH/LOW SIDE 8SOIC", Manufacturer="International Rectifier", ComponentLink1Description=Datasheet, ComponentLink1URL=http://www.infineon.com/dgdl/ir2181.pdf?fileId=5546d462533600a4015355c93cdd16ce, PackageReference=SOIC-8, PartNumber=IR2181STRPBF
U4: library part CMP-1685-00009-2, "IC OPAMP GP 2 CIRCUIT 8SOIC", Case/Package=SOIC, Dual Supply Voltage=9V, Input Bias Current=250nA, Input Offset Voltage (Vos)=7mV, Max Dual Supply Voltage=16V, Max Operating Temperature=70°C, Max Supply Voltage=32V, Min Dual Supply Voltage=1.5V, Min Operating Temperature=0°C, Min Supply Voltage=3V, Nominal Supply Current=1.2mA, Operating Supply Current=1mA, Output Current=30mA, Package Quantity=2500, Power Supply Rejection Ratio (PSRR)=65dB, Voltage Gain=100dB, Bandwidth=700kHz, Common Mode Rejection Ratio=65dB, Contact Plating=Gold, Gain Bandwidth Product=700kHz, Height=1.58mm, Lead Free="Lead Free", Length=4.9mm, Mount="Surface Mount", Number of Amplifiers=2, Number of Channels=2, Number of Circuits=2, Number of Elements=2, Number of Pins=8, Operating Supply Voltage=16V, Output Current per Channel=30mA, Packaging="Tape and Reel", Radiation Hardening=No, REACH SVHC="No SVHC", Slew Rate=0.3V/µs, Unity Gain Bandwidth Product=700kHz, Width=3.91mm

## Via types
v1: diameter 0.8, hole 0.4, Top Layer to Bottom Layer, tented both sides, 151 vias

## Nets (pads, with @x,y where several pads share a name; then routed paths per layer and width w, separated by ;. In a path a pad name is that pad's centre, name@x,y a point inside that pad or via, vN(x,y) a via of type N, cw(c..) or ccw(c..) an arc to the next point about the centre after c; other vN are vias at no path point)
GND: C6.1 C7.2 C10.1 D2.1 P2.8 P2.14 P2.18 R2.2 R3.2 R4.2 R9.2 R12.2 R15.2 R16.2 R19.1 R19.2 R20.2 R21.2 R24.1 R24.2 R25.2 R26.2 U1.7 U2.3 U3.3 U4.4 | length 267.5
  Top Layer w0.6: 203.808,81.432 203.808,88.517 208.331,93.04 R19.1 R19.2 ; P2.14 215.138,52.629 216.967,54.458 216.967,57.515 216.615,57.867 215.383,57.867 U3.3@215.338,57.912 ; v1(227.787,76.886) 227.841,76.886 227.918,76.962 U1.7 ; R24.2 R24.1 243.134,88.489 247.371,84.252 247.371,74.461 C10.1
  Top Layer w1: P2.18 204.978,49.709 205.564,49.124 215.062,49.124 ; P2.14 215.138,49.2 215.062,49.124 ; P2.8 230.378,49.709 229.792,49.124 215.062,49.124 ; D2.1 246.098,66.429 246.9,67.23 C10.1
  Bottom Layer w0.6: R19.1@208.331,95.504 R19.2 ; R19.2@208.331,98.044 R19.2 ; C6.1 213.862,75.546 214.932,75.546 214.938,75.54 226.441,75.54 v1(227.787,76.886) ; R20.2 216.988,96.332 217.163,96.157 217.163,96.12 218.211,95.072 225.831,95.072 226.86,94.043 226.86,92.862 ; 225.831,95.126 225.831,97.312 226.183,97.663 R25.2 230.267,102.337 225.45,102.337 225.233,102.119 221.777,102.119 221.763,102.133 212.75,102.133 R19.2 ; R21.2 226.86,92.862 ; R26.2 226.86,92.862 ; v1@227.828,76.927 227.832,76.923 229.231,76.923 R2.2 ; 230.327,102.337 238.989,102.337 243.026,98.299 243.026,97.593 R24.2 R24.1
  Bottom Layer w1: 203.86,56.185 203.86,61.684 ; 203.86,61.784 203.86,62.281 ; 203.86,73.912 203.808,73.965 203.808,79.224 202.26,80.772 202.26,83.16 203.708,84.607 204.368,84.607 204.368,86.833 R4.2@204.379,86.844 ; 203.931,56.114 204.978,55.067 P2.18 ; R16.2 207.635,63.932 207.635,62.281 ; R15.2 207.635,62.281 ; R3.2 211.531,75.885 ; 211.531,75.87 C6.1@212.937,75.87 ; C6.1@213.487,75.87 C6.1@212.937,75.87 ; C6.1 212.988,75.921 C6.1@212.937,75.87 ; P2.8 232.179,52.855 244.422,52.855 246.098,54.532 D2.1 ; 203.86,62.281 203.86,73.812 212.228,73.812 212.813,74.398 212.813,75.746 C6.1@212.937,75.87 ; 203.86,62.281 207.635,62.281
  other v1: 198,51 201,51 252,51 255,51 199.5,54 205.5,54 217.5,54 226.5,54 198,57 201,57 204,57 246,57 255,57 199.5,60 202.5,60 205.5,60 198,63 201,63 204,63 246,63 199.5,66 202.5,66 205.5,66 208.5,66 211.5,66 238.5,66 247.5,66 250.5,66 198,69 201,69 204,69 207,69 210,69 213,69 246,69 249,69 252,69 199.5,72 235.5,72 238.5,72 247.5,72 250.5,72 198,75 204,75 199.5,78 220.5,78 238.5,78 247.5,78 250.5,78 253.5,78 198,81 204,81 237,81 243,81 249,81 252,81 255,81 202.5,84 247.5,84 250.5,84 253.5,84 198,87 201,87 213,87 222,87 225,87 249,87 252,87 255,87 208.5,90 229.5,90 232.5,90 235.5,90 238.5,90 241.5,90 247.5,90 250.5,90 253.5,90 198,93 201,93 204,93 207,93 210,93 213,93 240,93 249,93 252,93 255,93 199.5,96 202.5,96 205.5,96 220.5,96 247.5,96 250.5,96 253.5,96 198,99 201,99 204,99 207,99 231,99 240,99 249,99 252,99 255,99 199.5,102 202.5,102 205.5,102 208.5,102 211.5,102 214.5,102 220.5,102 223.5,102 226.5,102 229.5,102 232.5,102 244.5,102 247.5,102 250.5,102 253.5,102
NetC1_1: C1.1 C8.1 D1.2 TP17.1 U2.8 | length 16.8
  Top Layer w0.6: TP17.1 235.941,68.453 235.941,64.655 236.127,64.469 236.127,64.304 236.677,63.754 D1.2 237.236,63.595 237.236,60.512 237.296,60.452 U2.8 ; D1.2@238.067,63.271 v1(239.293,63.271)
  Bottom Layer w1: C8.1@233.117,63.373 237.783,63.373 237.885,63.271 v1(239.293,63.271)
NetC1_2: C1.2 C8.2 P2.13 U2.6 | length 37.4
  Top Layer w0.6: P2.13 217.678,51.333 224.257,57.912 229.387,57.912 231.75,55.55 238.531,55.55 239.4,56.418 239.4,57.836 v1@239.362,57.874 ; U2.6 237.582,57.874 239.319,57.874 v1(239.357,57.836)
  Bottom Layer w1: C8.2@232.638,60.147 236.234,60.147 C1.2@237.046,60.147 ; C1.2 237.859,60.097 238.034,59.922 238.034,59.197 v1@239.357,57.874
NetC2_1: C2.1 C9.1 D3.2 TP21.1 U3.8 | length 13.4
  Top Layer w0.6: D3.2 219.812,63.62 v1(219.812,66.446) ; D3.2@219.862,63.57 220.018,63.414 U3.8@220.018,60.452
  Bottom Layer w0.6: C2.1@219.812,65.252 v1(219.812,66.446) 219.824,66.459 219.824,68.897 TP21.1@219.812,68.91
  Bottom Layer w1: C9.1@215.956,65.252 C2.1@219.522,65.252
NetC2_2: C2.2 C9.2 P2.17 U3.6 | length 30.3
  Top Layer w0.6: U3.6@220.069,57.912 220.129,57.972 220.811,57.972 223.19,60.35 v1(223.19,61.062)
  Bottom Layer w0.6: C2.2@219.761,62.027 220.536,62.027 221.502,61.062 v1@223.136,61.062
  Bottom Layer w1: P2.17 207.518,51.23 207.01,51.738 207.01,58.569 207.596,59.155 212.393,59.155 215.076,61.838 215.076,61.852 215.251,62.027 C9.2 ; C9.2@216.282,62.027 219.761,62.027 C2.2
NetC5_1: C5.1 D4.2 Q1.3 R5.2 R9.1 TP4.1 U1.4 | length 74.9
  Top Layer w0.6: v1(207.797,75.743) 207.797,74.022 C5.1 208.466,73.29 217.373,73.29 217.375,73.289 225.764,73.289 227.305,71.748 227.305,64.685 Q1.3@227.688,64.301 ; TP4.1 209.448,80.772 216.078,80.772 ; D4.2 217.043,92.761 216.893,92.611 216.868,92.611 216.179,91.923 216.179,80.874 216.078,80.772 ; U1.4 216.078,80.772
  Bottom Layer w0.6: R9.1 R5.2@207.66,82.591 ; R5.2 207.642,82.441 208.218,82.441 209.194,81.465 TP4.1 208.872,80.703 208.872,79.966 208.737,79.832 208.737,76.683 v1(207.797,75.743)
NetC5_2: C5.2 C6.2 Q1.4 R30.2 R31.2 TP16.1 U1.13 U1.14 | length 97.3
  Top Layer w0.6: TP16.1@200.666,84.678 200.666,77.597 200.666,77.495 ; v1(212.395,77.495) 200.666,77.495 ; Q1.4 225.831,64.707 225.831,72.013 225.48,72.365 202.717,72.365 202.366,72.716 202.366,73.29 201.666,73.99 C5.2 200.666,77.495 ; v1(232.802,81.442) 232.802,81.388 233.418,80.772 U1.13 ; v1@232.827,81.442 232.84,81.456 232.84,81.629 233.254,82.042 U1.14
  Bottom Layer w0.6: TP16.1@200.152,84.633 200.66,85.141 200.66,85.116 200.648,85.128 199.796,85.98 199.796,90.387 200.148,90.739 R31.2 ; R31.2@201.473,90.764 204.902,90.764 ; v1(212.395,77.495) 212.395,78.746 212.77,79.121 C6.2 213.843,79.477 218.923,79.477 220.97,81.524 R30.2 ; R30.2@223.378,81.48 232.764,81.48 v1(232.802,81.442)
NetC7_1: C7.1 TP14.1 U1.5 | length 16.8
  Top Layer w0.6: TP14.1 219.024,79.502 U1.5
  Bottom Layer w0.6: TP14.1 218.73,77.495 219.081,77.144 219.081,77.1 C7.1@219.334,76.847 ; C7.1@218.851,76.835 C7.1@219.317,76.835
NetC11_1: C11.1 P2.7 R18.1 R20.1 TP3.1 U4.5 | length 102.3
  Top Layer w0.6: TP3.1 222.172,100.381 ; v1(222.172,103.073) 222.172,100.381 ; 222.199,100.381 222.172,100.381 ; U4.5 222.524,98.882 222.172,99.234 222.172,100.381 ; P2.7 232.918,53.674 233.269,54.026 239.014,54.026 241.173,56.185 241.173,70.409 v1(239.649,71.933)
  Bottom Layer w0.6: C11.1@211.049,98.208 213.589,98.208 R18.1@213.919,98.208 ; R18.1 213.97,98.282 R20.1 216.776,98.32 216.776,100.343 TP3.1 ; v1(222.172,103.073) 222.226,103.073 222.344,103.191 241.6,103.191 245.25,99.541 245.25,76.924 240.297,71.971 239.687,71.971 v1(239.649,71.933)
NetC11_2: C11.2 D4.1 R18.2 R21.1 TP2.1 U4.7 | length 22.7
  Top Layer w0.6: D4.1 220.231,92.824 222.159,92.824 TP2.1 222.198,95.991 222.549,96.342 U4.7
  Bottom Layer w0.6: C11.2 211.224,96.509 213.793,96.509 R18.2 213.908,96.383 213.733,96.208 213.733,95.36 216.332,92.761 222.096,92.761 TP2.1 ; TP2.1@222.225,92.862 R21.1
NetC12_1: C12.1 R22.2 R23.1 R24.3 R25.1 TP19.1 U4.2 | length 32.7
  Top Layer w0.6: U4.2 231.877,96.342 232.918,95.301 TP19.1 241.558,95.301 241.91,95.652 241.91,99.625 242.261,99.977 243.085,99.977 R24.3
  Bottom Layer w0.6: R25.1 232.217,99.222 233.909,100.914 R23.1 236.236,100.664 236.511,100.388 236.511,96.482 237.236,95.757 TP19.1 237.223,95.288 235.226,95.288 R22.2
NetC12_2: C12.2 D5.1 R23.2 R26.1 TP20.1 U4.1 | length 23.3
  Top Layer w0.6: U4.1 230.814,95.072 231.165,94.721 TP20.1@231.165,92.964 ; TP20.1 231.394,92.939 233.426,92.939 D5.1
  Bottom Layer w0.6: R26.1 229.651,92.888 TP20.1@231.14,92.888 ; TP20.1 238.023,92.913 239.192,94.082 239.192,97.216 238.84,97.567 238.186,97.567 238.011,97.742 238.011,100.689 R23.2@238.236,100.914
NetC13_1: C13.1 R27.2 | length 2.7
  Bottom Layer w0.6: C13.1@215.798,84.137 R27.2@215.798,86.868
NetC13_2: C13.2 C14.1 D5.2 TP15.1 U1.3 | length 38.5
  Top Layer w0.6: TP15.1 218.516,84.659 221.133,82.042 U1.3 231.449,82.042 231.8,82.393 231.8,86.898 232.152,87.249 236.042,87.249 236.601,87.808 236.601,92.789 D5.2
  Bottom Layer w0.6: C14.1@211.056,82.728 C13.2@215.631,82.728 ; C13.2 215.921,82.812 216.949,82.812 218.194,84.056 218.194,84.793 TP15.1
NetC14_2: C14.2 R29.2 TP7.1 | length 5.1
  Bottom Layer w0.6: C14.2 210.926,84.232 210.926,85.115 ; R29.2 210.926,86.608 210.926,85.115 ; TP7.1 210.926,85.115
NetP2_1: P2.1 P2.4 R6.2 R32.2 | length 21.4
  Top Layer w1: P2.4 240.558,51.034 240.558,49.684 241.143,49.098 247.311,49.098 247.897,49.684 247.897,50.793 P2.1
  Bottom Layer w1.5: P2.1 248.209,51.105 248.209,58.14 R32.2 248.26,61.646 R6.2
NetP2_2: P2.2 R1.1 | length 36.2
  Top Layer w0.6: v1(241.783,76.886) 241.744,76.848 241.744,75.67 241.732,75.657 241.732,75.057 244.589,72.2 244.589,54.699 245.618,53.67 P2.2
  Bottom Layer w0.6: R1.1@233.023,76.901 R1.1 ; R1.1@233.451,76.894 241.775,76.894 v1(241.783,76.886)
NetP2_3: P2.3 R28.1 | length 48.4
  Top Layer w0.6: v1(240.829,86.6) 240.829,74.716 243.735,71.809 243.735,54.784 243.078,54.127 P2.3
  Bottom Layer w0.6: R28.1 232.918,84.303 235.215,86.6 v1(240.829,86.6)
NetP2_5: P2.5 R5.1 | length 72.4
  Top Layer w0.6: v1(207.493,87.249) 207.493,83.448 207.112,83.067 207.112,79.32 207.463,78.969 212.903,78.969 217.729,74.143 240.084,74.143 242.881,71.345 242.881,55.477 239.721,52.318 239.262,52.318 P2.5
  Bottom Layer w0.6: R5.1 207.48,84.579 207.48,87.236 v1(207.493,87.249)
NetP2_6: P2.6 TP22.1 U4.3 | length 65.7
  Top Layer w0.6: U4.3 TP22.1@234.112,97.612 ; TP22.1@234.315,97.765 v1(240.589,97.765) ; P2.6 237.576,53.172 239.368,53.172 242.027,55.831 242.027,70.904 239.97,72.961 v1@239.916,72.961
  Bottom Layer w0.6: v1(239.878,73) 244.396,77.518 244.396,90.96 240.589,94.767 v1(240.589,97.765)
NetP2_9: P2.9 Q1.2 | length 5.1
  Top Layer w1: Q1.2@227.774,56.101 227.774,51.117 P2.9
NetP2_10: P2.10 Q1.1 | length 4.9
  Top Layer w1: P2.10 Q1.1
NetP2_11: P2.11 R8.2 | length 3.2
  Bottom Layer w0.6: R8.2@223.291,53.744 R8.2
  Bottom Layer w1: P2.11 222.758,53.21 R8.2@223.291,53.744
NetP2_12: P2.12 R11.2 | length 3.5
  Bottom Layer w1: R11.2 220.116,53.947 220.218,53.844 P2.12
NetP2_15: P2.15 R13.2 | length 3.4
  Bottom Layer w1: P2.15 212.722,51.178 212.722,53.743 212.825,53.845 R13.2
NetP2_16: P2.16 R14.2 | length 3.3
  Bottom Layer w1: R14.2 209.968,53.794 210.071,53.692 210.071,51.354 210.058,51.342 P2.16
NetR1_2: R1.2 R2.1 TP8.1 U1.16 | length 16.3
  Top Layer w0.6: U1.16 TP8.1@238.074,84.582
  Bottom Layer w0.6: R2.1@229.273,78.839 231.543,78.839 231.556,78.851 R1.2 ; R1.2@233.989,78.851 234.442,79.304 234.442,84.256 234.793,84.607 TP8.1
NetR3_1: R3.1 R27.1 R30.1 TP5.1 U1.2 | length 35.7
  Top Layer w0.6: TP5.1@221.259,85.242 223.19,83.312 U1.2
  Bottom Layer w0.6: R3.1 210.613,77.835 210.788,78.01 210.788,78.177 210.972,78.362 210.972,80.421 211.324,80.772 217.401,80.772 TP5.1@221.718,85.089 ; R27.1@215.605,88.605 218.202,88.605 TP5.1 222.147,85.115 222.675,84.588 222.853,84.588 223.247,84.194 223.247,83.649 223.422,83.474 R30.1
NetR4_1: R4.1 R29.1 R31.1 U1.15 | length 38.3
  Top Layer w0.6: v1(232.918,86.03) 232.918,83.714 233.32,83.312 U1.15
  Bottom Layer w0.6: R31.1@201.473,88.941 R4.1@204.527,88.941 ; R4.1 210.57,88.961 210.824,88.707 R29.1 ; R29.1@211.324,88.707 211.499,88.882 211.499,89.132 212.001,89.634 224.31,89.634 227.914,86.03 v1(232.918,86.03)
NetR7_1: R7.1 R15.1 TP10.1 U2.1 U3.2 | length 56.3
  Top Layer w0.6: v1(211.531,60.757) 213.106,59.182 U3.2@215.338,59.182 ; v1(231.169,60.477) 231.181,60.465 232.851,60.465 U2.1
  Bottom Layer w0.6: R15.1 v1(211.531,60.757) 211.569,60.795 211.982,60.795 213.614,62.427 213.614,66.497 218.161,71.044 226.852,71.044 227.203,70.692 227.203,60.503 228.257,59.449 230.165,59.449 231.169,60.452 v1(231.169,60.477) ; v1@231.215,60.524 231.169,60.57 231.169,64.951 232.067,65.849 TP10.1 232.067,70.64 R7.1
NetR7_2: R7.2 U1.9 | length 10
  Top Layer w0.6: U1.9 237.436,75.692 237.487,75.641 v1(237.541,75.641)
  Bottom Layer w0.6: R7.2 234.649,72.705 235.001,73.056 235.001,74.879 235.763,75.641 v1(237.541,75.641)
NetR8_1: R8.1 TP11.1 U2.7 | length 37.3
  Top Layer w0.6: U2.7 237.569,59.207 239.37,59.207 239.721,59.559 239.721,60.971 v1(239.706,60.985)
  Bottom Layer w1: R8.1 226.819,56.873 228.651,55.042 238.582,55.042 240.919,57.379 240.919,60.985 240.919,68.605 TP11.1 ; v1(239.706,60.985) 240.894,60.985 240.919,60.96
NetR10_1: R10.1 R16.1 TP13.1 U2.2 U3.1 | length 44
  Top Layer w0.6: v1(211.414,63.906) 214.697,60.623 214.697,60.512 214.757,60.452 U3.1@215.338,60.452 ; v1(229.286,60.808) 230.911,59.182 U2.2
  Bottom Layer w0.6: R16.1 209.585,63.932 211.389,63.932 v1(211.414,63.906) 212.75,65.243 212.75,66.841 217.807,71.898 227.793,71.898 228.96,70.731 R10.1 229.21,60.938 229.286,60.862 v1(229.286,60.808)
NetR10_2: R10.2 U1.10 | length 9.7
  Top Layer w0.6: v1(233.756,75.274) 233.756,76.611 234.108,76.962 U1.10
  Bottom Layer w0.6: R10.2 229.401,72.681 229.576,72.856 229.576,73.588 229.927,73.939 233.405,73.939 233.756,74.291 v1(233.756,75.274)
NetR11_1: R11.1 U2.4 | length 18.3
  Top Layer w0.6: U2.4 233.436,56.642 U2.4@233.454,56.624 ; v1@234.333,56.624 v1(234.352,56.605)
  Top Layer w1: U2.4@233.454,56.624 v1@234.333,56.624
  Bottom Layer w0.6: v1@234.323,56.605 v1(234.352,56.605)
  Bottom Layer w1: R11.1@219.481,56.848 220.308,56.848 220.411,56.95 220.411,57.809 220.996,58.395 227.457,58.395 229.246,56.605 v1(234.352,56.605)
NetR12_1: R12.1 TP12.1 U1.6 | length 8.8
  Top Layer w0.6: TP12.1 225.83,77.749 226.313,78.232 U1.6
  Bottom Layer w0.6: R12.1@222.373,77.404 R12.1@222.86,77.404 ; R12.1@222.402,77.394 224.562,77.394 225.401,78.232 TP12.1@225.577,78.232
NetR13_1: R13.1 TP18.1 U3.7 | length 28.2
  Top Layer w0.6: U3.7@220.018,59.182 220.078,59.242 220.786,59.242 221.082,59.538 221.087,59.538 221.411,59.863 221.411,59.867 222.021,60.477 222.021,62.636 v1(221.996,62.662)
  Bottom Layer w0.6: 222.722,62.662 222.783,62.724
  Bottom Layer w1: R13.1 213.612,57.049 214.529,57.049 217.129,59.649 223.783,59.649 224.511,60.376 224.511,62.076 223.925,62.662 222.722,62.662 v1(221.996,62.662) ; 222.783,62.724 TP18.1
NetR14_1: R14.1 U3.4 | length 6.6
  Top Layer w1: v1(209.626,57.353) 210.337,56.642 U3.4
  Bottom Layer w1: R14.1@209.575,56.721 209.626,56.773 v1(209.626,57.353)
NetR17_2: R17.2 R19.3 TP1.1 U4.6 | length 19
  Top Layer w0.6: R19.3 211.353,100.254 213.944,97.663 TP1.1 219.558,97.612 U4.6
  Bottom Layer w0.6: TP1.1 219.519,97.65 221.643,97.65 R17.2
NetR28_2: R28.2 TP9.1 U1.1 | length 8.4
  Top Layer w0.6: TP9.1@225.425,85.573 226.416,84.582 U1.1
  Bottom Layer w0.6: TP9.1 225.654,85.192 226.543,84.303 R28.2
VCC: C10.2 D1.1 D2.2 D3.1 R6.1 R17.1 R22.1 R32.1 TP6.1 U1.8 U1.11 U1.12 U2.5 U3.5 U4.8 | length 170.2
  Top Layer w0.6: D3.1 215.86,63.754 216.41,63.204 216.41,62.355 217.983,60.782 217.983,57.125 218.465,56.642 U3.5 220.027,56.702 220.735,56.702 221.031,56.998 221.087,56.998 221.411,57.323 221.411,57.364 223.661,59.614 226.365,59.614 228.702,61.951 231.274,61.951 D1.1@232.743,63.421 ; U4.8 227.278,95.072 ; v1@227.278,96.39 227.278,95.072 ; v1(227.278,96.444) 227.304,96.47 227.304,98.881 v1(227.33,98.908) v1@227.355,98.882 ; v1(228.498,87.554) 228.444,87.554 227.278,88.721 227.278,95.072 ; U1.8 232.363,75.692 232.715,76.043 232.715,78.257 ; D1.1 D1.1@232.743,63.421 ; D1.1@233.477,63.754 234.027,64.304 234.027,65.346 v1(234.061,65.38) ; U1.11 232.74,78.232 232.715,78.257 ; U2.5 236.22,56.642 235.362,57.5 235.362,60.726 233.809,62.279 233.809,63.204 232.96,63.204 D1.1@232.743,63.421 ; v1(246.304,78.969) 246.304,84.099 242.849,87.554 v1(241.783,87.554) 240.153,87.554 239.801,87.202 239.801,80.057 239.247,79.502 U1.12 233.066,79.502 232.715,79.151 232.715,78.257
  Top Layer w1.5: TP6.1 253.987,59.957 253.987,73.977 C10.2
  Bottom Layer w0.6: R17.1 223.606,97.888 223.781,98.063 224.031,98.063 224.876,98.908 v1(227.33,98.908) ; v1(227.278,96.444) 228.446,95.275 R22.1 ; v1(228.498,87.554) v1(241.783,87.554)
  Bottom Layer w1: v1(234.061,65.38) 234.061,69.429 235.301,70.668 ; 235.371,70.739 253.313,70.739 253.898,70.153 D2.2 ; 246.304,70.839 v1(246.304,78.969)
  Bottom Layer w1.5: R32.1 251.473,58.204 251.473,59.931 ; R6.1 251.473,61.658 251.473,59.931 ; TP6.1@253.975,59.931 TP6.1@253.962,59.931 ; TP6.1 TP6.1@253.962,59.931 ; 251.473,59.931 TP6.1@253.962,59.931

## Polygon pours and split planes (outlines as drawn)
GND on Bottom Layer "GND_L02_P000" (solid, pour order 0): 196.85,103.632 196.85,48.641 256.845,48.641 256.845,103.632
GND on Top Layer "GND_L01_P002" (solid, pour order 2): 196.85,103.632 196.85,48.641 256.845,48.641 256.845,103.632

## Silkscreen, mask and mechanical layers (free items; w line width, h text height)
Top Overlay:
  circle w0.013: c210.064,51.025 r0.55
  circle w0.013: c238.004,51.025 r0.55
  circle w0.013: c235.464,51.025 r0.55
  circle w0.013: c243.084,51.025 r0.55
  circle w0.013: c204.984,51.025 r0.55
  circle w0.013: c207.524,51.025 r0.55
  circle w0.013: c248.164,51.025 r0.55
  circle w0.013: c245.624,51.025 r0.55
  circle w0.013: c240.544,51.025 r0.55
  circle w0.013: c222.764,51.025 r0.55
  circle w0.013: c220.224,51.025 r0.55
  circle w0.013: c227.844,51.025 r0.55
  circle w0.013: c217.684,51.025 r0.55
  circle w0.013: c230.384,51.025 r0.55
  circle w0.013: c212.604,51.025 r0.55
  circle w0.013: c215.144,51.025 r0.55
  circle w0.013: c225.304,51.025 r0.55
  circle w0.013: c232.924,51.025 r0.55
  text "GND" at 205.486,52.807 h0.6 r90
  text "VS_2" at 207.85,52.781 h0.6 r90
  text "KAT" at 228.067,52.375 h0.6 r90
  text "AND" at 225.577,52.299 h0.6 r90
  text "VCC" at 248.539,52.299 h0.6 r90
  text "LO_2" at 210.364,52.273 h0.6 r90
  text "HO_2" at 212.93,52.273 h0.6 r90
  text "GND" at 215.468,52.273 h0.6 r90
  text "VS_1" at 218.086,52.273 h0.6 r90
  text "LO_1" at 220.575,52.273 h0.6 r90
  text "HO_1" at 223.115,52.273 h0.6 r90
  text "GND" at 230.683,52.273 h0.6 r90
  text "FDB_2" at 233.25,52.273 h0.6 r90
  text "FDB_1" at 235.79,52.273 h0.6 r90
  text "DT" at 238.277,52.273 h0.6 r90
  text "VCC" at 240.919,52.273 h0.6 r90
  text "IO" at 243.408,52.273 h0.6 r90
  text "IS" at 245.897,52.273 h0.6 r90
Mechanical 1:
  circle w0.013: c201.85,53.632 r1.5
  circle w0.013: c251.85,53.632 r1.5
Top 3D Body:
  region: 248.737,51.826 248.874,51.735 248.965,51.599 248.997,51.438 248.989,50.613 248.997,50.613 248.965,50.452 248.874,50.315 248.737,50.224 248.576,50.192 247.751,50.2 247.751,50.192 247.59,50.224 247.454,50.315 247.363,50.452 247.331,50.613 247.339,51.438 247.331,51.438 247.363,51.599 247.454,51.735 247.59,51.826 247.751,51.858 247.751,51.85 248.576,51.85 248.576,51.858
Bottom 3D Body:
  circle w0.013: c238.004,51.025 r0.825
  circle w0.013: c235.464,51.025 r0.825
  circle w0.013: c240.544,51.025 r0.825
  circle w0.013: c232.924,51.025 r0.825
  circle w0.013: c243.084,51.025 r0.825
  circle w0.013: c210.064,51.025 r0.825
  circle w0.013: c207.524,51.025 r0.825
  circle w0.013: c204.984,51.025 r0.825
  circle w0.013: c245.624,51.025 r0.825
  circle w0.013: c217.684,51.025 r0.825
  circle w0.013: c220.224,51.025 r0.825
  circle w0.013: c227.844,51.025 r0.825
  circle w0.013: c212.604,51.025 r0.825
  circle w0.013: c225.304,51.025 r0.825
  circle w0.013: c222.764,51.025 r0.825
  circle w0.013: c230.384,51.025 r0.825
  circle w0.013: c215.144,51.025 r0.825
  circle w0.013: c212.604,51.025 r0.825
  circle w0.013: c215.144,51.025 r0.825
  circle w0.013: c217.684,51.025 r0.825
  circle w0.013: c220.224,51.025 r0.825
  circle w0.013: c222.764,51.025 r0.825
  circle w0.013: c225.304,51.025 r0.825
  circle w0.013: c227.844,51.025 r0.825
  circle w0.013: c230.384,51.025 r0.825
  circle w0.013: c232.924,51.025 r0.825
  circle w0.013: c243.084,51.025 r0.825
  circle w0.013: c245.624,51.025 r0.825
  circle w0.013: c240.544,51.025 r0.825
  circle w0.013: c238.004,51.025 r0.825
  circle w0.013: c235.464,51.025 r0.825
  circle w0.013: c210.064,51.025 r0.825
  circle w0.013: c207.524,51.025 r0.825
  circle w0.013: c204.984,51.025 r0.825
  region: 248.737,51.826 248.874,51.735 248.965,51.599 248.997,51.438 248.989,50.613 248.997,50.613 248.965,50.452 248.874,50.315 248.737,50.224 248.576,50.192 247.751,50.2 247.751,50.192 247.59,50.224 247.454,50.315 247.363,50.452 247.331,50.613 247.339,51.438 247.331,51.438 247.363,51.599 247.454,51.735 247.59,51.826 247.751,51.858 247.751,51.85 248.576,51.85 248.576,51.858
Top Assembly:
  the board outline again, w0.013
Bottom Assembly:
  circle w0.013: c212.604,51.025 r0.825
  circle w0.013: c215.144,51.025 r0.825
  circle w0.013: c217.684,51.025 r0.825
  circle w0.013: c220.224,51.025 r0.825
  circle w0.013: c222.764,51.025 r0.825
  circle w0.013: c225.304,51.025 r0.825
  circle w0.013: c227.844,51.025 r0.825
  circle w0.013: c230.384,51.025 r0.825
  circle w0.013: c232.924,51.025 r0.825
  circle w0.013: c243.084,51.025 r0.825
  circle w0.013: c245.624,51.025 r0.825
  circle w0.013: c240.544,51.025 r0.825
  circle w0.013: c238.004,51.025 r0.825
  circle w0.013: c235.464,51.025 r0.825
  circle w0.013: c210.064,51.025 r0.825
  circle w0.013: c207.524,51.025 r0.825
  circle w0.013: c204.984,51.025 r0.825
  region: 248.737,51.826 248.874,51.735 248.965,51.599 248.997,51.438 248.989,50.613 248.997,50.613 248.965,50.452 248.874,50.315 248.737,50.224 248.576,50.192 247.751,50.2 247.751,50.192 247.59,50.224 247.454,50.315 247.363,50.452 247.331,50.613 247.339,51.438 247.331,51.438 247.363,51.599 247.454,51.735 247.59,51.826 247.751,51.858 247.751,51.85 248.576,51.85 248.576,51.858